# Altium PCB AS5147.PcbDoc
Units mil, origin at the board's own origin, x right, y up, seen from the top; angles counter-clockwise.
Board outline 1199.85 x 1200 mil, 2 copper layers (Top Layer, Bottom Layer); 4 components, 8 nets, 31 pads, 3 vias.
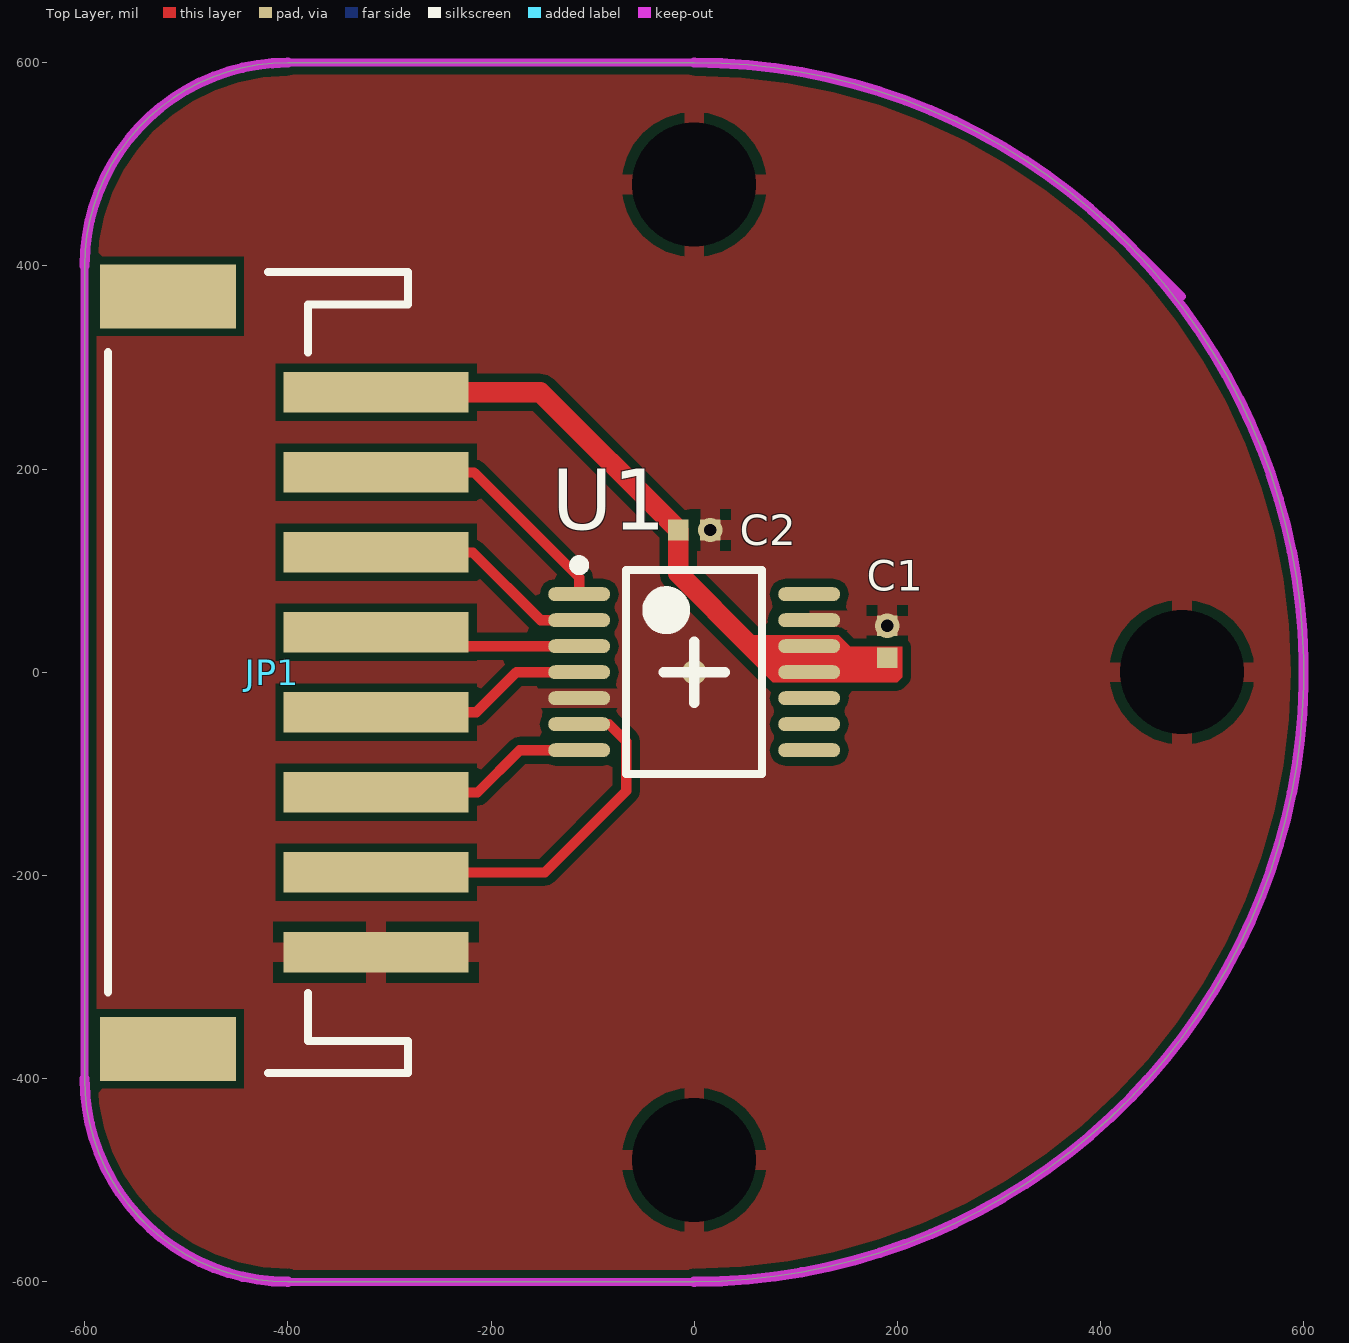
[diagram p0: Top Layer view]
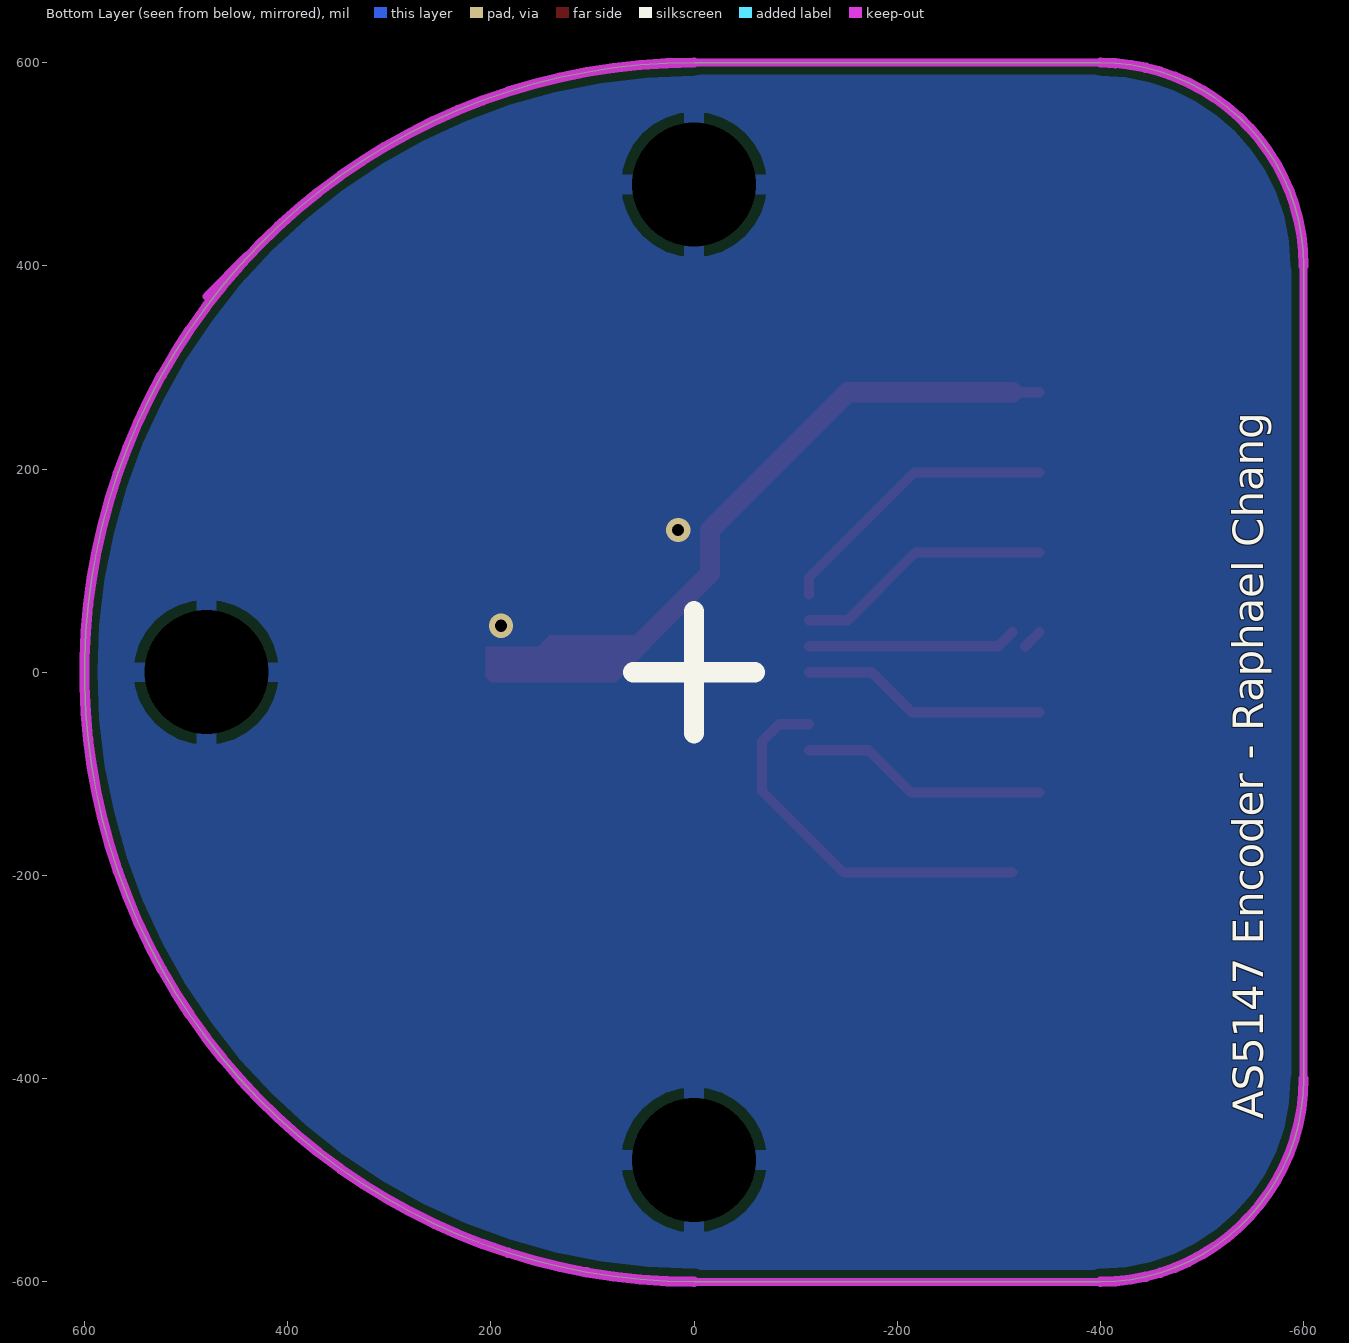
[diagram p1: Bottom Layer view, seen from below]

## Layer stack, top to bottom
Top Solder: solder mask 0.4, Solder Resist, Dk 3.5
Top Layer: signal copper 1.4
Dielectric 1: dielectric 12.6, FR-4, Dk 4.8
Bottom Layer: signal copper 1.4
Bottom Solder: solder mask 0.4, Solder Resist, Dk 3.5

## Board outline
-600,-400 ccw(c-400,-400) -400,-600 0,-600 ccw(c0,0) 0,600 -400,600 ccw(c-400,400) -600,400

## Design rules (kind name [scope] priority, off if disabled: settings)
Clearance [All] p1: gap=7.87
PolygonConnect PolygonConnect_1 [IsVia] p1: connectstyle=Direct reliefconductorwidth=10 reliefentries=4 polygonreliefangle="90 Angle" airgapwidth=10
PolygonConnect [All] p2: connectstyle=Relief reliefconductorwidth=20 reliefentries=4 polygonreliefangle="90 Angle" airgapwidth=10
RoutingVias [All] p1: holewidth=28 width=50 viastyle="Through Hole" minholewidth=28 minwidth=50 maxholewidth=28 maxwidth=50
SolderMaskExpansion [All] p1: expansion=4
Width [All] p1: maxlimit=20 minlimit=10 preferedwidth=10
30 further rules are at their usual default settings.

## Components (designator, comment, footprint, x,y, rotation, side; value= is the part's Value field where it differs from the comment)
C1 "100nF" CAPC0402(1005)60_L 190,30 r270 top
C2 "1uF" CAPC0402(1005)60_L 0,140 r180 top
JP1 "" JST-8-SMD -510,0 r90 top
U1 "AS5147P" AMS-TSSOP-14-5000X4400DE_N 0,0 r0 top

## Footprints (in the part's own frame and the unit in brackets; to place one, negate y for a bottom-side part, rotate by r counter-clockwise, add the part's x,y. Pads: shape width x height; smd on the part's side, far side on the other; paste and mask are expansions set on the pad)
AMS-TSSOP-14-5000X4400DE_N [mm] "TSOP, 14-Leads, Body 5.00x4.40mm, Pitch 0.65mm, IPC Medium Density"
  oval 1.55x0.35 smd: 1(-2.875,1.95) 2(-2.875,1.3) 3(-2.875,0.65) 4(-2.875,0) 5(-2.875,-0.65) 6(-2.875,-1.3) 7(-2.875,-1.95) 8(2.875,-1.95) 9(2.875,-1.3) 10(2.875,-0.65) 11(2.875,0) 12(2.875,0.65) 13(2.875,1.3) 14(2.875,1.95)
  silkscreen extent -3,-2.55 1.7,2.8, body extent -2.25,-2.55 2.25,2.55, height 1.2
CAPC0402(1005)60_L [mm] "Chip Capacitor, Body 1.0x0.5mm, Height 0.6mm, IPC High Density"
  rect 0.52x0.52 smd: 1(-0.4,0) 2(0.4,0)
  body extent -0.55,-0.3 0.55,0.3, height 0.6
JST-8-SMD [mil]
  rect 40x182 smd: 1(-275.59,-196.85) 2(-196.85,-196.85) 3(-118.11,-196.85) 4(-39.37,-196.85) 5(39.37,-196.85) 6(118.11,-196.85) 7(196.85,-196.85) 8(275.59,-196.85)
  rect 63x134 smd: NC1(-370.68,7.94) NC2(369.85,7.94)
  silkscreen extent -394,-228 394,67, body extent -392,-272 392,67, height 220

## Part data
C1: library part CMP-1034-02060-1, "CAP 100nF 6.3V ±5% 0402 (1005 Metric) Thickness 0.6mm SMD"
C2: library part CMP-1034-02113-1, "CAP 1uF 6.3V ±10% 0402 (1005 Metric) Thickness 0.6mm SMD"
JP1: library part JST_8_VERT
U1: library part AMS-AS5147P

## Free pads (board coordinates)
  round 118.11 hole 122.05 mask+0: 2(0,480) 3(480,0) 4(0,-480)

## Via types
v1: diameter 24, hole 12, Top Layer to Bottom Layer, tented both sides, 3 vias

## Nets (pads, with @x,y where several pads share a name; then routed paths per layer and width w, separated by ;. In a path a pad name is that pad's centre, name@x,y a point inside that pad or via, vN(x,y) a via of type N, cw(c..) or ccw(c..) an arc to the next point about the centre after c; other vN are vias at no path point)
A: JP1.3 U1.7 | length 244
  Top Layer w10: JP1.3@-340,-118.37 -213.37,-118.37 -171.77,-76.77 U1.7
B: JP1.2 U1.6 | length 381.5
  Top Layer w10: JP1.2@-313.15,-197.11 -147.11,-197.11 -66.93,-116.93 -66.93,-68.07 -83.82,-51.18 U1.6
CLK: JP1.6 U1.2 | length 254.4
  Top Layer w10: JP1.6@-340,117.85 -217.85,117.85 -151.18,51.18 U1.2
CS: JP1.7 U1.1 | length 286.1
  Top Layer w10: JP1.7@-340,196.59 -216.59,196.59 -113.19,93.19 U1.1
GND: C1.1 C2.1 JP1.1 pad.2 pad.3 pad.4 U1.5 U1.13
  other v1: 0,0 190,45.75 15.75,140
MISO: JP1.5 U1.3 | length 225.5
  Top Layer w10: JP1.5@-340,39.63 JP1.5@-325.96,25.59 ; JP1.5 -299.37,25.59 U1.3
MOSI: JP1.4 U1.4 | length 243.1
  Top Layer w10: JP1.4@-340,-39.37 -214.37,-39.37 -175,0 U1.4
VCC: C1.2 C2.2 JP1.8 U1.11 U1.12 | length 690.1
  Top Layer w10: JP1.8@-340,275.59 JP1.8
  Top Layer w20: JP1.8 -151.34,275.59 C2.2 -15.75,97.18 55.85,25.59 U1.12 U1.11 175.75,0 C1.2
pads on no net: JP1.NC1 JP1.NC2 U1.8 U1.9 U1.10 U1.14

## Polygon pours and split planes (outlines as drawn)
GND on Bottom Layer "GND_L02_P000" (solid, remove dead copper, pour order 0): -600,600 600,600 600,-600 -600,-600
GND on Top Layer "GND_L01_P002" (solid, remove dead copper, pour order 2): -600.57,596.75 599.43,596.75 599.43,-603.25 -600.57,-603.25

## Keep-outs
Keep-Out Layer:
  lines w7.87: -600,-400 -600,400 ; -400,-600 0,-600 ; -400,600 0,600 ; 440,410 480,370
  lines w10: -600,-400 ccw(c-400,-400) -400,-600 ; -600,400 cw(c-400,400) -400,600 ; 0,-600 ccw(c0,0) 0,600

## Other copper
Top Layer:
  region net VCC: 77.21,-10 43.6,23.6 56.23,36.23 142.34,36.23 153.58,25 205,25 205,-5 200,-10

## Silkscreen, mask and mechanical layers (free items; w line width, h text height)
Top Overlay:
  lines w10: -30,0 30,0 ; 0,-30 0,30
Bottom Overlay:
  lines w20: -60,0 60,0 ; 0,-60 0,60
  text "AS5147 Encoder - Raphael Chang" at -560,-440 h30 r270